# Altium PCB PCB1.PcbDoc
Units mm, origin at the board's own origin, x right, y up, seen from the top; angles counter-clockwise.
Board outline 200 x 170 mm, 2 copper layers (Top Layer, Bottom Layer); 91 components, 73 nets, 246 pads, 10 vias.
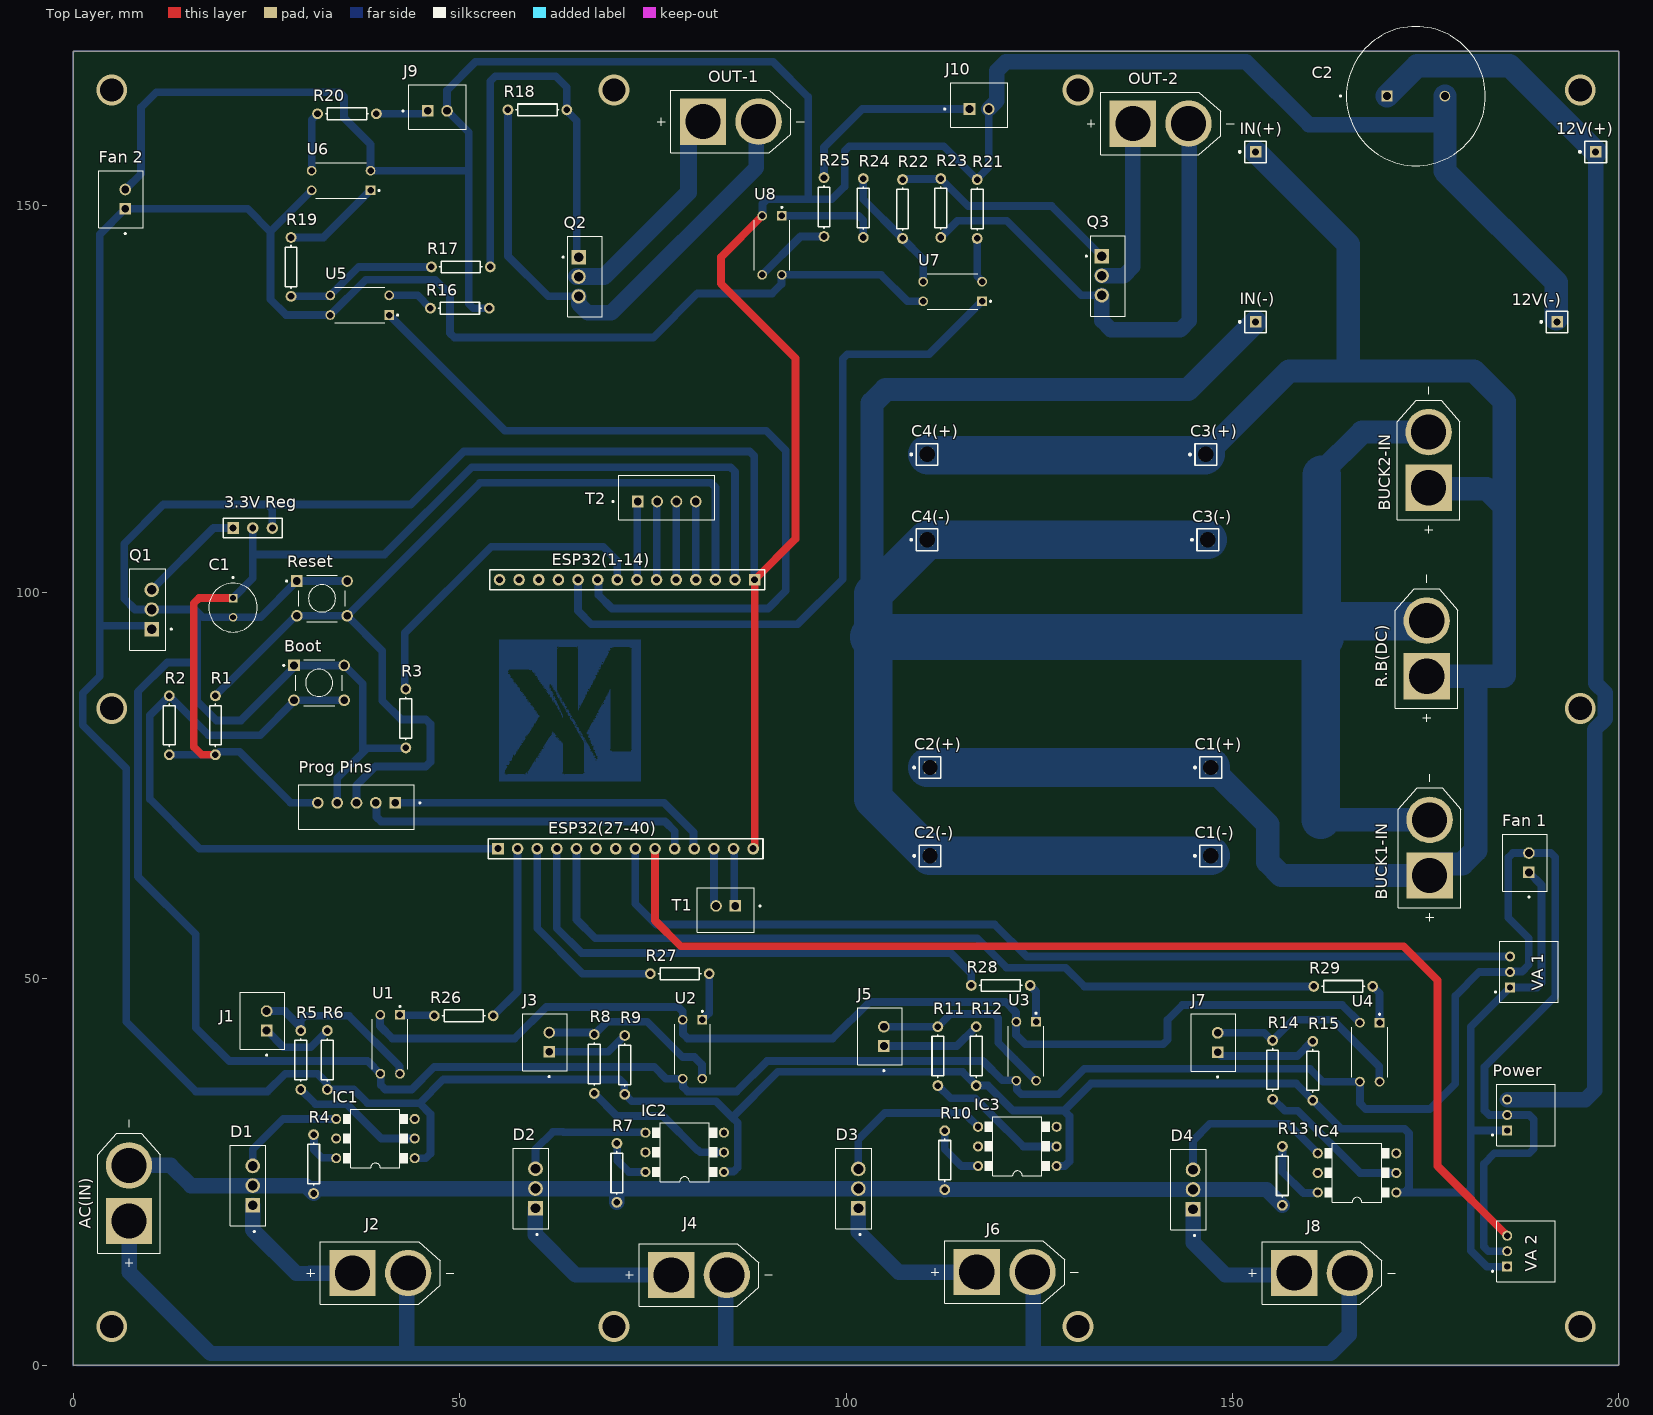
[diagram p0: Top Layer view]
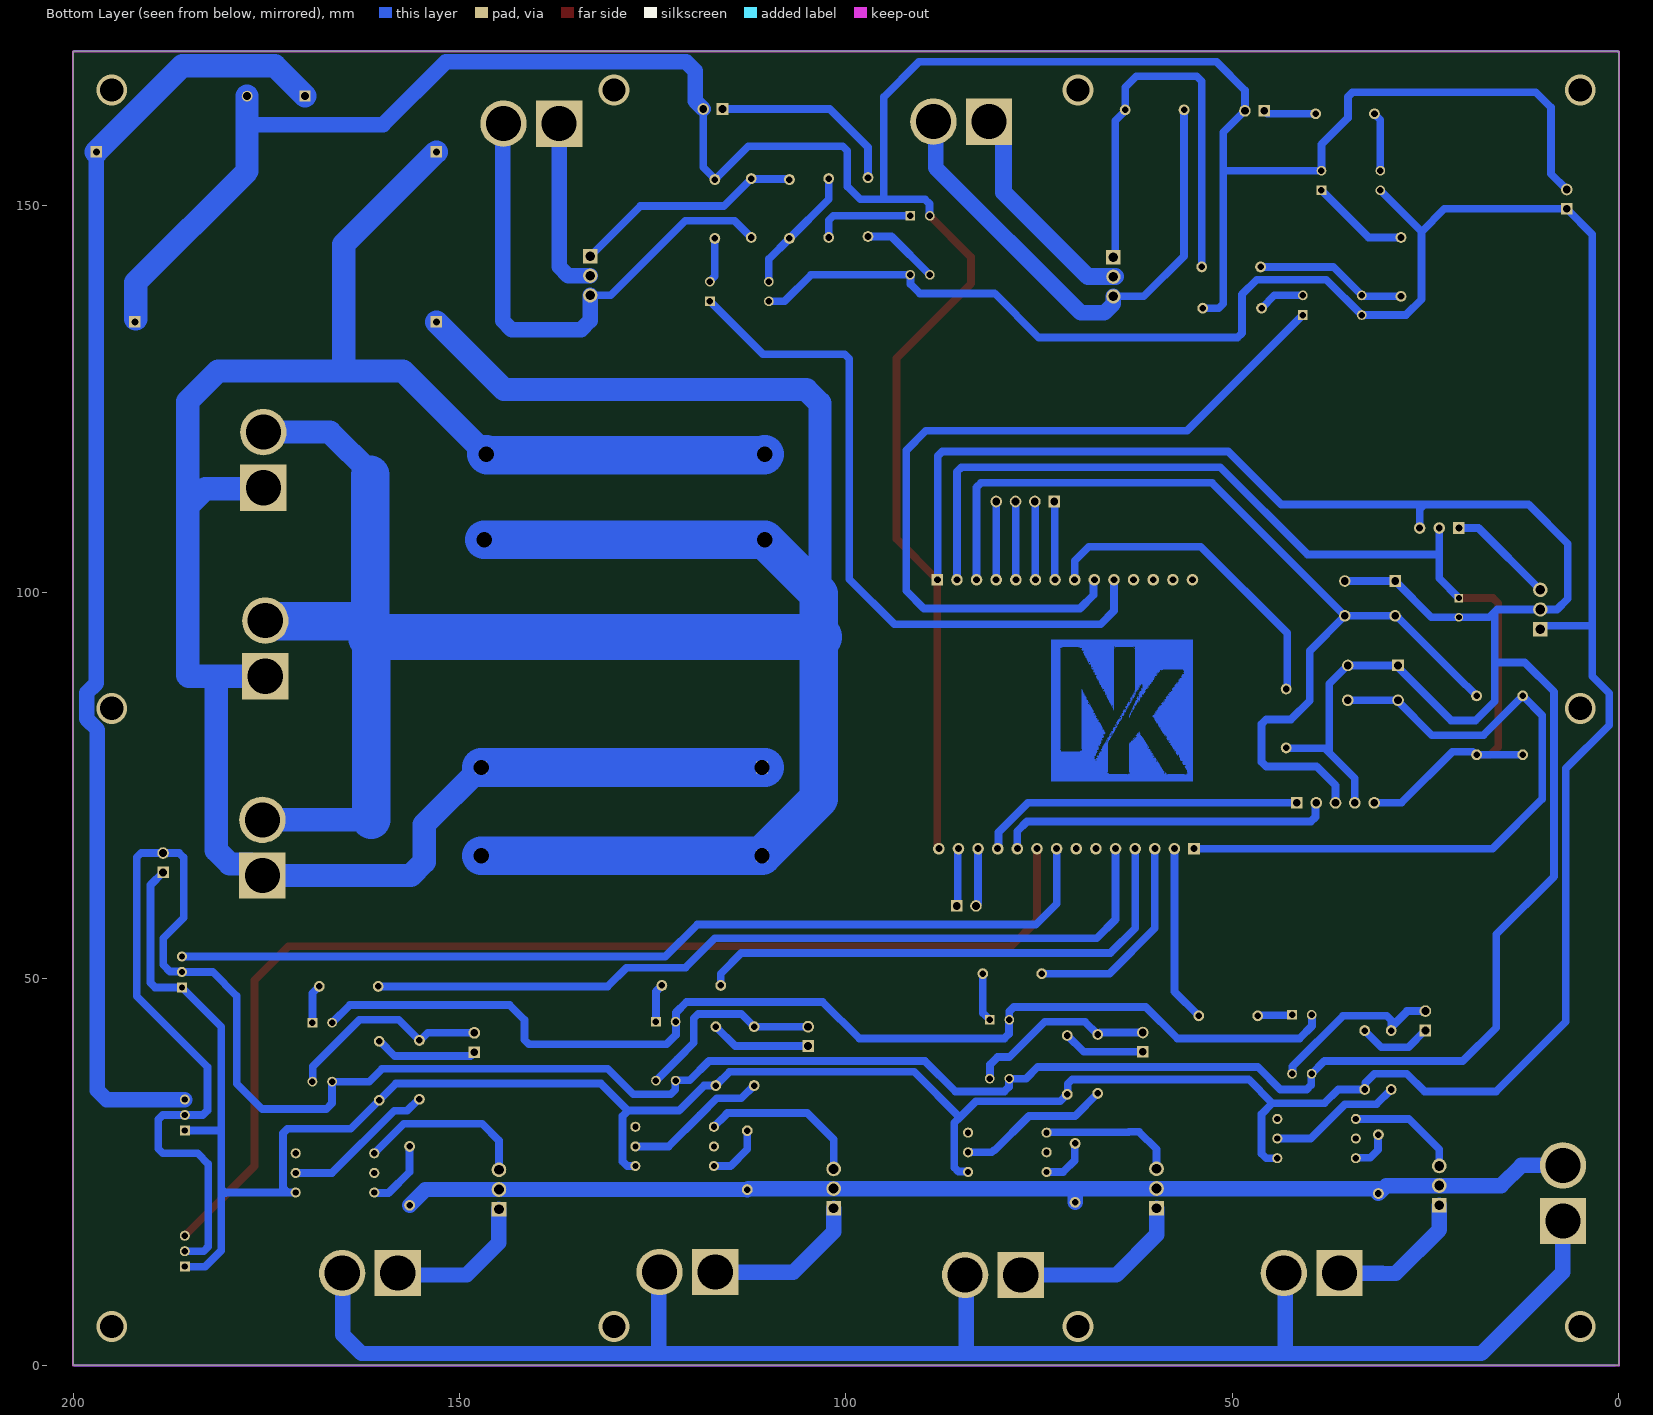
[diagram p1: Bottom Layer view, seen from below]

## Layer stack, top to bottom
Top Solder: solder mask 0.0102, Solder Resist, Dk 3.5
Top Layer: signal copper 0.0356
Dielectric 1: dielectric 0.32, FR-4, Dk 4.8
Bottom Layer: signal copper 0.0356
Bottom Solder: solder mask 0.0102, Solder Resist, Dk 3.5

## Board outline
0,0 200,0 200,170 0,170

## Design rules (kind name [scope] priority, off if disabled: settings)
Clearance [All] p1: gap=0.254 ignorepadtopadclearanceinfootprint=FALSE except(0: Arc-Hole Track-Hole SMDPad-Hole THPad-Hole Via-Hole Fill-Hole Poly-Hole Region-Hole Text-Hole)
PolygonConnect [All] p1: connectstyle=Relief reliefconductorwidth=0.254 reliefentries=4 polygonreliefangle="90 Angle" airgapwidth=0.254
RoutingVias [All] p1: holewidth=0.711 width=1.27 viastyle="Through Hole" minholewidth=0.711 minwidth=1.27 maxholewidth=0.711 maxwidth=1.27
SolderMaskExpansion [All] p1: expansion=0.102 istentingtop=FALSE
Width [All] p1: maxlimit=3 minlimit=0.1 preferedwidth=1 toplayer_minwidth=1 toplayer_maxwidth=1 minimp=50.000000 maximp=50.000000 favimp=50.000000
30 further rules are at their usual default settings.

## Components (designator, comment, footprint, x,y, rotation, side; value= is the part's Value field where it differs from the comment)
"3.3V Reg" "Header 3" HDR1X3 20.701,108.331 r0 top
12V(+) "Plug" PIN1#1 197,157 r90 top
12V(-) "Plug" PIN1#1 192,135 r90 top
AC(IN) "XT60-M" AMASS_XT60-M 7.239,22.269 r90 top
Boot "1825910-2" TE_1825910-2 28.575,90.551 r0 top
BUCK1-IN "XT60-M" AMASS_XT60-M 175.514,66.973 r90 top
BUCK2-IN "XT60-M" AMASS_XT60-M 175.387,117.138 r90 top
C1 "100uF" CAPPRD250W50D630H1500 20.701,98.024 r270 top
C1(+) "Plug" PIN1#2 147.193,77.343 r90 top
C1(-) "Plug" PIN1#3 147.193,65.913 r90 top
C2 "4700uF" CAPPRD750W80D1800H3150 173.736,164.211 r0 top
C2(+) "Plug" PIN1#3 110.871,77.343 r90 top
C2(-) "Plug" PIN1#3 110.871,65.913 r90 top
C3(+) "Plug" PIN1#3 146.558,117.856 r90 top
C3(-) "Plug" PIN1#3 146.812,106.807 r90 top
C4(+) "Plug" PIN1#3 110.49,117.856 r90 top
C4(-) "Plug" PIN1#3 110.49,106.807 r90 top
D1 "BTA16-600B" TO255P1040X460X1975-3 23.241,20.701 r90 top
D2 "BTA16-600B" TO255P1040X460X1975-3 59.817,20.32 r90 top
D3 "BTA16-600B" TO255P1040X460X1975-3 101.6,20.31 r90 top
D4 "BTA16-600B" TO255P1040X460X1975-3 144.907,20.193 r90 top
ESP32(1-14) "Header 14" HDR1X14 88.189,101.638 r180 top
ESP32(27-40) "Header 14" HDR1X14 54.969,66.838 r0 top
"Fan 1" "B2B-XH-A(LF)(SN)" JST_B2B-XH-A(LF)(SN) 187.833,65.024 r90 top
"Fan 2" "B2B-XH-A(LF)(SN)" JST_B2B-XH-A(LF)(SN) 6.223,150.876 r90 top
IC1 "MOC3020" DIL06-A 39.116,29.337 r90 top
IC2 "MOC3020" DIL06-A 79.121,27.559 r90 top
IC3 "MOC3020" DIL06-A 122.174,28.321 r90 top
IC4 "MOC3020" DIL06-A 166.116,24.892 r90 top
IN(+) "Plug" PIN1#1 153,157 r90 top
IN(-) "Plug" PIN1#1 153,135 r90 top
J1 "B2B-XH-A(LF)(SN)" JST_B2B-XH-A(LF)(SN) 24.511,44.577 r90 top
J2 "XT60-M" AMASS_XT60-M 39.751,11.938 r0 top
J3 "B2B-XH-A(LF)(SN)" JST_B2B-XH-A(LF)(SN) 61.07,41.803 r90 top
J4 "XT60-M" AMASS_XT60-M 80.982,11.684 r0 top
J5 "B2B-XH-A(LF)(SN)" JST_B2B-XH-A(LF)(SN) 104.377,42.565 r90 top
J6 "XT60-M" AMASS_XT60-M 120.523,12.065 r0 top
J7 "B2B-XH-A(LF)(SN)" JST_B2B-XH-A(LF)(SN) 147.557,41.763 r90 top
J8 "XT60-M" AMASS_XT60-M 161.588,11.938 r0 top
J9 "B2B-XH-A(LF)(SN)" JST_B2B-XH-A(LF)(SN) 47.137,162.831 r0 top
J10 "B2B-XH-A(LF)(SN)" JST_B2B-XH-A(LF)(SN) 117.221,163.068 r0 top
OUT-1 "XT60-M" AMASS_XT60-M 85.09,160.909 r0 top
OUT-2 "XT60-M" AMASS_XT60-M 140.716,160.655 r0 top
Power "" JST_S3B-PH-K-S(LF)(SN) 185.547,30.385 r90 top
"Prog Pins" "" JST_B5B-XH-A(LF)(SN) 36.663,72.246 r180 top
Q1 "LM7805CT/NOPB" TO254P1054X470X1955-3 10.16,97.79 r90 top
Q2 "IRF3205" TO254P1041X444X2933-3 65.405,143.383 r270 top
Q3 "IRF3205" TO254P1041X444X2933-3 133.096,143.51 r270 top
R1 "" AXIAL-0.3 18.415,82.804 r90 top value=10K
R2 "" AXIAL-0.3 12.446,82.804 r90 top value=10K
R3 "" AXIAL-0.3 43.053,83.693 r90 top value=10K
R4 "" AXIAL-0.3 31.115,26.035 r90 top value="100 Ohm"
R5 "" AXIAL-0.3 29.464,39.497 r270 top value=330R
R6 "" AXIAL-0.3 32.893,39.497 r270 top value=220R
R7 "" AXIAL-0.3 70.358,24.892 r90 top value="100 Ohm"
R8 "" AXIAL-0.3 67.437,38.989 r270 top value=330R
R9 "" AXIAL-0.3 71.374,38.862 r270 top value=220R
R10 "" AXIAL-0.3 112.776,26.543 r90 top value="100 Ohm"
R11 "" AXIAL-0.3 111.887,40.005 r270 top value=330R
R12 "" AXIAL-0.3 116.84,40.005 r270 top value=220R
R13 "" AXIAL-0.3 156.464,24.511 r90 top value="100 Ohm"
R14 "" AXIAL-0.3 155.194,38.227 r270 top value=330R
R15 "" AXIAL-0.3 160.401,38.1 r270 top value=220R
R16 "" AXIAL-0.3 50.038,136.779 r0 top value="100 Ohm"
R17 "" AXIAL-0.3 50.165,142.113 r180 top value="100 Ohm"
R18 "" AXIAL-0.3 60.071,162.433 r0 top value=10k
R19 "" AXIAL-0.3 28.194,142.113 r270 top value="330 Ohm"
R20 "" AXIAL-0.3 35.433,161.925 r0 top value=220R
R21 "" AXIAL-0.3 116.967,149.606 r90 top value="100 Ohm"
R22 "" AXIAL-0.3 107.315,149.606 r270 top value="100 Ohm"
R23 "" AXIAL-0.3 112.268,149.733 r90 top value=10k
R24 "" AXIAL-0.3 102.235,149.733 r90 top value="330 Ohm"
R25 "" AXIAL-0.3 97.155,149.86 r90 top value=220R
R26 "" AXIAL-0.3 50.546,45.212 r180 top value="100 Ohm"
R27 "" AXIAL-0.3 78.486,50.673 r0 top value="100 Ohm"
R28 "" AXIAL-0.3 120.015,49.149 r0 top value="100 Ohm"
R29 "" AXIAL-0.3 164.338,49.022 r0 top value="100 Ohm"
R.B(DC) "XT60-M" AMASS_XT60-M 175.133,92.754 r90 top
Reset "1825910-2" TE_1825910-2 28.956,101.473 r0 top
T1 "B2B-XH-A(LF)(SN)" JST_B2B-XH-A(LF)(SN) 84.435,58.911 r180 top
T2 "B4B-XH-A(LF)(SN)" JST_B4B-XH-A(LF)(SN) 76.815,112.285 r0 top
U1 "PC817X3NSZ1B" DIP762W50P254L495H455Q4 41.021,41.529 r270 top
U2 "PC817X3NSZ1B" DIP762W50P254L495H455Q4 80.137,40.894 r270 top
U3 "PC817X3NSZ1B" DIP762W50P254L495H455Q4 123.317,40.64 r270 top
U4 "PC817X3NSZ1B" DIP762W50P254L495H455Q4 167.767,40.513 r270 top
U5 "PC817X3NSZ1B" DIP762W50P254L495H455Q4 37.084,137.16 r180 top
U6 "PC817X3NSZ1B" DIP762W50P254L495H455Q4 34.671,153.289 r180 top
U7 "PC817X3NSZ1B" DIP762W50P254L495H455Q4 113.792,138.938 r180 top
U8 "PC817X3NSZ1B" DIP762W50P254L495H455Q4 90.424,144.907 r270 top
"VA 1" "S3B-PH-K-S(LF)(SN)" JST_S3B-PH-K-S(LF)(SN) 185.928,48.895 r90 top
"VA 2" "S3B-PH-K-S(LF)(SN)" JST_S3B-PH-K-S(LF)(SN) 185.547,12.764 r90 top

## Footprints (in the part's own frame and the unit in brackets; to place one, negate y for a bottom-side part, rotate by r counter-clockwise, add the part's x,y. Pads: shape width x height; smd on the part's side, far side on the other; paste and mask are expansions set on the pad)
AMASS_XT60-M [mm]
  round 6 hole 4.55: N(3.6,0)
  rect 6x6 / inner round 6 / far side rect 6x6 hole 4.55: P(-3.6,0)
  silkscreen extent -9.5,-4.05 9.5,4.05, body extent -4.05,0 4.05,20.5, height 7.75
AXIAL-0.3 [mm] "Axial Device, Thru-Hole; 2 Leads; 0.3 in Pin Spacing"
  round 1.4 hole 0.85: 1(-3.81,0) 2(3.81,0)
  silkscreen extent -2.77,-0.76 2.77,0.76
CAPPRD250W50D630H1500 [mm]
  round 1.1 hole 0.75: N(1.25,0)
  rect 1.1x1.1 / inner round 1.1 / far side rect 1.1x1.1 hole 0.75: P(-1.25,0)
  silkscreen extent -4,-3.15 3.15,3.15, body extent -3.15,-3.15 3.15,3.15, height 15
CAPPRD750W80D1800H3150 [mm]
  round 1.4 hole 1.05: N(3.75,0)
  rect 1.4x1.4 hole 1.05: P(-3.75,0)
  silkscreen extent -9.85,-9 9,9, body extent -9,-9 9,9, height 31.5
DIL06-A [mm]
  round 1.308 hole 0.8: 1(-2.54,-5.08) 2(0,-5.08) 3(2.54,-5.08) 4(2.54,5.08) 5(0,5.08) 6(-2.54,5.08)
  silkscreen extent -3.81,-4.19 3.81,4.19
DIP762W50P254L495H455Q4 [mm]
  rect 1.26x1.26 / inner round 1.26 / far side rect 1.26x1.26 hole 0.84: 1(-3.81,1.27)
  round 1.26 hole 0.84: 2(-3.81,-1.27) 3(3.81,-1.27) 4(3.81,1.27)
  silkscreen extent -5.01,-2.3 3.25,2.3, body extent -3.94,-2.3 3.94,2.3, height 4.55
HDR1X3 [mm] "Connector; Header; 3 Position"
  rect 1.5x1.5 hole 0.9: 1(0,0)
  round 1.5 hole 0.9: 2(2.54,0) 3(5.08,0)
  silkscreen extent -1.27,-1.27 6.35,1.27
HDR1X14 [mm] "Connector; Header; 14 Position"
  rect 1.5x1.5 hole 0.9: 1(0,0)
  round 1.5 hole 0.9: 2(2.54,0) 3(5.08,0) 4(7.62,0) 5(10.16,0) 6(12.7,0) 7(15.24,0) 8(17.78,0) 9(20.32,0) 10(22.86,0) 11(25.4,0) 12(27.94,0) 13(30.48,0) 14(33.02,0)
  silkscreen extent -1.27,-1.27 34.29,1.27
JST_B2B-XH-A(LF)(SN) [mm]
  rect 1.508x1.508 hole 1: 1(-1.25,-0.525)
  round 1.508 hole 1: 2(1.25,-0.525)
  silkscreen extent -4.55,-2.88 3.7,2.88, body extent -3.7,-2.88 3.7,2.88, height 7
JST_B4B-XH-A(LF)(SN) [mm]
  rect 1.508x1.508 / inner round 1.508 / far side rect 1.508x1.508 hole 1: 1(-3.75,-0.525)
  round 1.508 hole 1: 2(-1.25,-0.525) 3(1.25,-0.525) 4(3.75,-0.525)
  silkscreen extent -7.05,-2.88 6.2,2.88, body extent -6.2,-2.88 6.2,2.88, height 7
JST_B5B-XH-A(LF)(SN) [mm]
  rect 1.508x1.508 / inner round 1.508 / far side rect 1.508x1.508 hole 1: 1(-5,-0.525)
  round 1.508 hole 1: 2(-2.5,-0.525) 3(0,-0.525) 4(2.5,-0.525) 5(5,-0.525)
  silkscreen extent -8.3,-2.88 7.45,2.88, body extent -7.45,-2.88 7.45,2.88, height 7
JST_S3B-PH-K-S(LF)(SN) [mm]
  rect 1.308x1.308 hole 0.8: 1(0,0)
  round 1.308 hole 0.8: 2(2,0) 3(4,0)
  silkscreen extent -1.95,-6.25 5.95,2
PIN1#1 [mm] "Connector; Plug"
  rect 1.5x1.5 hole 0.9: 1(0,0)
  silkscreen extent -1.4,-1.4 1.4,2.17
PIN1#2 [mm] "Connector; Plug"
  rect 1.5x1.5 hole 2: ""(0,0)
  silkscreen extent -1.4,-1.4 1.4,2.17
PIN1#3 [mm] "Connector; Plug"
  rect 1.5x1.5 hole 2: 1(0,0)
  silkscreen extent -1.4,-1.4 1.4,2.17
TE_1825910-2 [mm]
  rect 1.498x1.498 / inner round 1.498 / far side rect 1.498x1.498 hole 0.99: 1(0,0)
  round 1.498 hole 0.99: 2(6.5,0) 3(0,-4.5) 4(6.5,-4.5)
  silkscreen extent -1.42,-5.25 6.24,0.74
TO254P1041X444X2933-3 [mm]
  rect 1.85x1.85 hole 1.23: 1(0,0)
  round 1.85 hole 1.23: 2(2.54,0) 3(5.08,0)
  silkscreen extent -2.67,-2.1 7.75,3.03, body extent -2.67,-1.41 7.75,3.04, height 19.3
TO254P1054X470X1955-3 [mm]
  rect 1.86x1.86 hole 1.24: 1(-2.54,0)
  round 1.86 hole 1.24: 2(0,0) 3(2.54,0)
  silkscreen extent -5.27,-2.64 5.27,2.86
TO255P1040X460X1975-3 [mm]
  rect 1.91x1.91 hole 1.27: 1(0,0)
  round 1.91 hole 1.27: 2(2.55,0) 3(5.1,0)
  silkscreen extent -3.5,-1.7 7.75,2.9

## Part data
"3.3V Reg": "Header, 3-Pin", LatestRevisionDate=17-Jul-2002, LatestRevisionNote="Re-released for DXP Platform.", Publisher="Altium Limited"
AC(IN) BUCK1-IN BUCK2-IN J2 J4 J6 J8 OUT-1 OUT-2 R.B(DC): "Plug; DC supply; XT60; male; PIN: 2; for cable; soldered; 30A; 500V", Package=Package, Availability="Not in stock", Check_prices=https://www.snapeda.com/parts/XT60-M/AMASS/view-part/?ref=eda, MF=AMASS, MP=XT60-M, Price=None, SnapEDA_Link=https://www.snapeda.com/parts/XT60-M/AMASS/view-part/?ref=snap
Boot Reset: "50 mA SPST Round Actuator 160 Gram Force Tactile Pushbutton Switch", Package=None, Availability="In Stock", Check_prices=https://www.snapeda.com/parts/1825910-2/TE+Connectivity+ALCOSWITCH+Switches/view-part/?ref=eda, EU_RoHS_Compliance=Compliant, MF="TE Connectivity", MP=1825910-2, Price=None, Purchase-URL=https://pricing.snapeda.com/search/part/1825910-2/?ref=eda, SnapEDA_Link=https://www.snapeda.com/parts/1825910-2/TE+Connectivity+ALCOSWITCH+Switches/view-part/?ref=snap
C1: library part EEUEB1E101, "CAP ALUM 100UF 20% 25V RADIAL", Package="RADIAL-2 Panasonic", Availability="In Stock", Check_prices=https://www.snapeda.com/parts/EEUEB1E101/Panasonic/view-part/?ref=eda, MF=Panasonic, MP=EEUEB1E101, Price=None, Purchase-URL=https://pricing.snapeda.com/search/part/EEUEB1E101/?ref=eda, SnapEDA_Link=https://www.snapeda.com/parts/EEUEB1E101/Panasonic/view-part/?ref=snap
C2: library part EEUTP1E472, "CAP ALUM 4700UF 20% 25V RADIAL", Package="RADIAL-2 Panasonic", Availability="In Stock", Check_prices=https://www.snapeda.com/parts/EEU-TP1E472/Panasonic/view-part/2307869/?ref=eda, MF=Panasonic, MP=EEU-TP1E472, Price=None, Purchase-URL=https://pricing.snapeda.com/search/part/EEU-TP1E472/?ref=eda, SnapEDA_Link=https://www.snapeda.com/parts/EEU-TP1E472/Panasonic/view-part/2307869/?ref=snap
D1 D2 D3 D4: "TRIAC Standard 600V 16A Through Hole IITO-220E", Package=None, Availability=Unavailable, MP=BTA16-600B, Price=None
ESP32(1-14) ESP32(27-40): "Header, 14-Pin", LatestRevisionDate=17-Jul-2002, LatestRevisionNote="Re-released for DXP Platform.", Publisher="Altium Limited"
"Fan 1" "Fan 2" J1 J3 J5 J7 J9 J10 T1: "Connector Header Through Hole 2 position 0.098 (2.50mm)", Package=None, Availability="In Stock", Check_prices=https://www.snapeda.com/parts/B2B-XH-A(LF)(SN)/JST+Sales+America+Inc./view-part/?ref=eda, MF="JST Sales America Inc.", MP=B2B-XH-A(LF)(SN), Price=None, Purchase-URL=https://pricing.snapeda.com/search/part/B2B-XH-A(LF)(SN)/?ref=eda, SnapEDA_Link=https://www.snapeda.com/parts/B2B-XH-A(LF)(SN)/JST+Sales+America+Inc./view-part/?ref=snap
IC1 IC2 IC3 IC4: "Optoisolator Triac Output 5300Vrms 1 Channel 6-DIP", Package="DIP-6 ON Semiconductor", Availability=Unavailable, MF="ON Semiconductor", MP=MOC3020, Price=None, SnapEDA_Link=https://www.snapeda.com/parts/MOC3020/ON%20Semiconductor/view-part/2780094/?ref=snap
Power: library part S3B-PH-K-S(LF)(SN), "Connector Header Through Hole, Right Angle 3 position 0.079\" (2.00mm)", Package=None, Availability=Unavailable, MP=S3B-PH-K-S(LF)(SN), Price=None
"Prog Pins": library part B5B-XH-A(LF)(SN), "Connector Header Through Hole 5 position 0.098 (2.50mm)", Package=None, Availability="In Stock", Check_prices=https://www.snapeda.com/parts/B5B-XH-A(LF)(SN)/JST+Sales+America+Inc./view-part/?ref=eda, MF="JST Sales America Inc.", MP=B5B-XH-A(LF)(SN), Price=None, Purchase-URL=https://pricing.snapeda.com/search/part/B5B-XH-A(LF)(SN)/?ref=eda, SnapEDA_Link=https://www.snapeda.com/parts/B5B-XH-A(LF)(SN)/JST+Sales+America+Inc./view-part/?ref=snap
Q1: Package=None, Availability=Unavailable, MP=LM7805CT/NOPB, Price=None
Q2 Q3: "N-Channel 55V 110A (Tc) 200W (Tc) Through Hole TO-220AB", Package="TO-220 Infineon", Availability="In Stock", Check_prices=https://www.snapeda.com/parts/IRF3205/Infineon+Technologies/view-part/?ref=eda, MF="Infineon Technologies", MP=IRF3205, Price=None, Purchase-URL=https://pricing.snapeda.com/search/part/IRF3205/?ref=eda, SnapEDA_Link=https://www.snapeda.com/parts/IRF3205/Infineon+Technologies/view-part/?ref=snap
R1 R2 R3 R4 R5 R6 R7 R8 R9 R10 R11 R12 R13 R14 R15 R16 R17 R18 R19 R20 R21 R22 R23 R24 R25 R26 R27 R28 R29: library part Res1, "Resistor", LatestRevisionDate=17-Jul-2002, LatestRevisionNote="Re-released for DXP Platform.", PackageDescription="Axial Device, Thru-Hole; 2 Leads; 0.3 in Pin Spacing", PackageReference=AXIAL-0.3, Published=8-Jun-2000, Publisher="Altium Limited"
T2: "Connector Header Through Hole 4 position 0.098 (2.50mm)", Package=None, Availability="In Stock", Check_prices=https://www.snapeda.com/parts/B4B-XH-A(LF)(SN)/JST+Sales+America+Inc./view-part/?ref=eda, MF="JST Sales", MP=B4B-XH-A(LF)(SN), Price=None, Purchase-URL=https://pricing.snapeda.com/search/part/B4B-XH-A(LF)(SN)/?ref=eda, SnapEDA_Link=https://www.snapeda.com/parts/B4B-XH-A(LF)(SN)/JST+Sales+America+Inc./view-part/?ref=snap
U1 U2 U3 U4 U5 U6 U7 U8: "Optoisolator Transistor Output - 1 Channel 4-DIP", Package="DIP-4 Sharp Microelectronics", Availability="In Stock", Check_prices=https://www.snapeda.com/parts/PC817X3NSZ1B/Sharp+Microelectronics/view-part/?ref=eda, MF="Sharp Microelectronics", MP=PC817X3NSZ1B, Price=None, Purchase-URL=https://pricing.snapeda.com/search/part/PC817X3NSZ1B/?ref=eda, SnapEDA_Link=https://www.snapeda.com/parts/PC817X3NSZ1B/Sharp+Microelectronics/view-part/?ref=snap
"VA 1" "VA 2": "Connector Header Through Hole, Right Angle 3 position 0.079\" (2.00mm)", Package=None, Availability=Unavailable, MP=S3B-PH-K-S(LF)(SN), Price=None
12V(+) 12V(-) C1(+) C1(-) C2(+) C2(-) C3(+) C3(-) C4(+) C4(-) IN(+) IN(-): LatestRevisionDate=17-Jul-2002, LatestRevisionNote="Re-released for DXP Platform.", Publisher="Altium Limited"

## Via types
v1: diameter 4, hole 3, Top Layer to Bottom Layer, 10 vias

## Nets (pads, with @x,y where several pads share a name; then routed paths per layer and width w, separated by ;. In a path a pad name is that pad's centre, name@x,y a point inside that pad or via, vN(x,y) a via of type N, cw(c..) or ccw(c..) an arc to the next point about the centre after c; other vN are vias at no path point)
"Net3.3V Reg_1": "3.3V Reg.1" Q1.3 | length 13.9
  Bottom Layer w1: Q1.3 18.161,108.331 20.701,108.331
"Net3.3V Reg_2": "3.3V Reg.2" "Prog Pins.5" C1.P ESP32(1-14).2 R1.1 R2.1 | length 140.7
  Top Layer w1: R1.1 16.637,78.994 15.621,80.01 15.621,98.599 16.296,99.274 C1.P
  Bottom Layer w1: R2.1 R1.1 18.523,78.994 18.904,79.375 21.532,79.375 28.136,72.771 31.663,72.771 ; C1.P 23.241,101.814 23.241,104.902 ; 23.241,108.331 23.241,104.902 ; 85.649,101.638 85.649,115.619 85.063,116.205 51.578,116.205 40.275,104.902 23.241,104.902
"Net3.3V Reg_3": 12V(-).1 "3.3V Reg.3" "Fan 1.2" "Fan 2.2" "Prog Pins.4" "VA 1.2" "VA 2.2" Boot.1 Boot.2 C1.N C2.N ESP32(1-14).1 ESP32(27-40).14 J9.2 J10.2 Power.2 Q1.2 R3.1 R16.2 R21.2 Reset.1 Reset.2 U1.3 U2.3 U3.3 U4.3 U6.2 U8.2 | length 951.3
  Top Layer w1: 87.989,66.838 87.989,66.973 88.189,67.173 88.189,101.638 93.472,106.921 93.472,130.302 83.82,139.954 83.82,143.383 U8.2
  Bottom Layer w1: 6.748,152.126 8.795,154.173 8.795,162.769 10.746,164.719 34.466,164.719 35.052,164.133 35.052,161.389 38.481,157.96 U6.2 51.054,154.559 51.181,154.686 ; 25.781,108.331 25.781,110.793 25.195,111.379 ; 34.163,72.771 34.163,75.946 37.465,79.248 ; Reset.2 Reset.1 24.257,96.774 C1.N 16.764,96.774 16.066,97.472 ; R3.1@43.053,79.842 38.059,79.842 37.465,79.248 ; R16.2 51.767,136.779 51.181,137.365 51.181,154.686 ; 88.189,101.638 88.138,101.689 88.138,117.651 87.552,118.237 50.546,118.237 43.688,111.379 25.195,111.379 ; U8.2 89.203,148.766 89.203,150.29 89.789,150.876 95.123,150.876 ; J10.2 118.471,155.023 116.967,153.519 R21.2 112.649,157.734 100.408,157.734 99.822,157.148 99.822,152.527 98.171,150.876 95.123,150.876 ; 185.547,14.764 183.102,14.764 182.499,15.367 182.499,26.035 183.896,27.432 188.39,27.432 188.976,28.018 188.976,31.799 188.39,32.385 Power.2 183.212,32.385 182.626,32.971 182.626,38.608 191.77,47.752 191.77,65.708 191.184,66.294 188.378,66.294 188.358,66.274 186.26,66.274 185.674,65.688 185.674,57.912 188.341,55.245 188.341,51.816 187.479,50.954 185.987,50.954 185.928,50.895 181.942,50.895 178.816,47.769 178.816,36.449 175.514,33.147 167.259,33.147 166.497,33.909 U4.3 161.671,36.703 160.02,38.354 130.81,38.354 127.508,35.052 122.683,35.052 122.097,35.638 122.097,36.78 U3.3 121.997,36.88 120.219,36.88 117.729,39.37 89.789,39.37 85.852,35.433 79.503,35.433 78.917,36.019 78.917,37.034 U2.3 76.708,37.084 75.184,38.608 46.736,38.608 43.815,35.687 40.387,35.687 39.801,36.273 39.801,37.669 38.1,39.37 20.193,39.37 15.875,43.688 15.875,55.753 8.382,63.246 8.382,87.122 12.192,90.932 16.066,90.932 ; 16.066,90.932 16.066,97.472 ; 16.066,90.932 16.066,85.915 18.542,83.439 21.717,83.439 28.326,90.048 28.326,90.302 Boot.1 Boot.2 37.465,88.161 37.465,79.248 ; 16.066,97.472 15.748,97.79 Q1.2 8.001,97.79 6.604,99.187 6.604,106.299 11.684,111.379 25.195,111.379 ; 51.181,154.686 51.181,159.512 J9.2 48.387,164.973 52.07,168.656 90.551,168.656 95.123,164.084 95.123,150.876
  Bottom Layer w2: J10.2 119.507,163.579 119.507,167.484 120.679,168.656 151.765,168.656 159.893,160.528 177.486,160.528
  Bottom Layer w3: C2.N 177.486,160.528 177.486,154.514 191.897,140.103 191.897,135.382
Net12V(+)_1: 12V(+).1 C2.P Power.3 | length 167.6
  Bottom Layer w2: Power.3 195.678,34.385 196.85,35.557 196.85,82.248 198.254,83.652 198.254,86.991 197,88.246 197,157
  Bottom Layer w3: C2.P 173.923,168.148 185.852,168.148 197,157
NetAC(IN)_N: AC(IN).N D1.2 D2.2 D3.2 D4.2 R4.1 R7.1 R10.1 R13.1 | length 153.5
  Bottom Layer w2: 7.239,25.869 12.612,25.869 15.23,23.251 30.089,23.251 R4.1 ; R4.1@31.115,22.87 D2.2 70.231,22.87 ; R7.1 70.358,22.743 70.231,22.87 ; R13.1 154.422,22.743 D4.2 112.786,22.743 R10.1 112.649,22.86 D3.2 101.59,22.87 70.231,22.87
NetAC(IN)_P: AC(IN).P J2.N J4.N J6.N J8.N | length 209.1
  Bottom Layer w2: 7.239,18.669 7.239,12.065 17.78,1.524 43.18,1.524 ; J2.N 43.18,11.767 43.18,1.524 ; J4.N 84.455,11.557 84.455,1.524 ; J6.N 124.206,11.982 124.206,1.524 ; J8.N 165.1,11.85 165.1,3.937 162.687,1.524 124.206,1.524 ; 43.18,1.524 84.455,1.524 ; 84.455,1.524 124.206,1.524
NetBoot_3: Boot.3 Boot.4 ESP32(27-40).1 R2.2 | length 88.8
  Bottom Layer w1: Boot.4 Boot.3 28.575,85.916 24.193,81.534 17.526,81.534 R2.2 9.906,84.074 9.906,73.279 16.347,66.838 54.969,66.838
NetBUCK1-IN_N: BUCK1-IN.N BUCK2-IN.N C1(-).1 C2(-).1 C3(-).1 C4(-).1 IN(-).1 R.B(DC).N | length 345.7
  Bottom Layer w3: 103.505,99.822 103.378,99.949 103.378,124.481 105.135,126.238 144.238,126.238 153,135 ; 161.036,114.681 161.544,115.189 161.39,115.343 166.784,120.738 BUCK2-IN.N ; 161.417,70.573 BUCK1-IN.N ; 161.544,94.107 161.544,96.266 ; 175.045,96.266 175.133,96.354
  Bottom Layer w5: 146.812,106.807 110.49,106.807 103.505,99.822 103.505,94.234 103.505,73.279 110.871,65.913 147.193,65.913 ; 161.417,70.573 161.417,94.234 ; 161.544,115.189 161.544,96.266 175.045,96.266
  Bottom Layer w6: 103.505,94.234 161.417,94.234
NetBUCK1-IN_P: BUCK1-IN.P BUCK2-IN.P C2(+).1 C3(+).1 C4(+).1 IN(+).1 R.B(DC).P | length 274
  Bottom Layer w3: 146.558,117.856 157.353,128.651 164.973,128.651 ; 147.193,77.343 154.559,69.977 154.559,65.13 156.316,63.373 BUCK1-IN.P 177.014,64.873 179.726,64.873 181.483,66.63 181.483,89.154 ; 153,157 164.973,145.027 164.973,128.651 ; 175.133,89.154 181.483,89.154 ; BUCK2-IN.P 175.521,113.404 182.887,113.404 185.166,111.125 ; 164.973,128.651 181.229,128.651 185.166,124.714 185.166,111.125 ; 181.483,89.154 185.039,89.154 185.166,89.281 185.166,111.125
  Bottom Layer w5: 110.49,77.343 110.871,77.343 147.193,77.343 ; 110.49,117.856 110.617,117.729 146.431,117.729 146.558,117.856
NetD1_1: D1.1 J2.P | length 18.4
  Bottom Layer w2: D1.1 23.241,17.526 28.89,11.877 30.546,11.877 30.607,11.938 J2.P
NetD1_3: D1.3 IC1.4 | length 14.6
  Bottom Layer w1: D1.3 23.241,27.94 27.178,31.877 IC1.4
NetD2_1: D2.1 J4.P | length 23.2
  Bottom Layer w2: D2.1 59.817,16.891 65.024,11.684 J4.P
NetD2_3: D2.3 IC2.4 | length 17.7
  Bottom Layer w1: D2.3 59.817,27.94 62.103,30.226 63.373,30.226 63.443,30.156 73.984,30.156 IC2.4
NetD3_1: D3.1 J6.P | length 20.5
  Bottom Layer w2: D3.1 101.6,17.272 106.807,12.065 J6.P
NetD3_3: D3.3 IC3.4 | length 21.5
  Bottom Layer w1: D3.3 101.6,29.21 105.029,32.639 115.365,32.639 115.57,32.434 115.57,32.385 IC3.4
NetD4_1: D4.1 J8.P | length 19.2
  Bottom Layer w2: D4.1 144.907,15.875 149.098,11.684 157.734,11.684 J8.P
NetD4_3: D4.3 IC4.4 | length 22.4
  Bottom Layer w1: D4.3 144.907,29.083 147.066,31.242 157.226,31.242 IC4.4
NetESP32(1-14)_3: "Prog Pins.3" ESP32(1-14).3 R1.2 Reset.3 Reset.4 | length 126.6
  Bottom Layer w1: R1.2 21.098,89.297 28.525,96.724 28.572,96.724 28.821,96.973 Reset.3 Reset.4 ; 36.663,72.771 36.671,72.779 36.671,75.025 39.116,77.47 45.642,77.47 46.228,78.056 46.228,82.98 45.642,83.566 42.418,83.566 40.005,85.979 40.005,92.424 Reset.4 ; 83.109,101.638 83.109,113.587 82.523,114.173 52.656,114.173 Reset.4
NetESP32(1-14)_4: ESP32(1-14).4 T2.4 | length 10.1
  Bottom Layer w1: T2.4 80.567,111.758 80.567,101.64 80.569,101.638
NetESP32(1-14)_5: ESP32(1-14).5 T2.3 | length 10.1
  Bottom Layer w1: 78.029,101.638 78.047,101.656 78.047,111.742 T2.3
NetESP32(1-14)_6: ESP32(1-14).6 T2.2 | length 10.2
  Bottom Layer w1: 75.489,101.638 75.527,101.676 75.527,111.722 T2.2
NetESP32(1-14)_7: ESP32(1-14).7 T2.1 | length 10.2
  Bottom Layer w1: 72.949,101.638 73.007,101.696 73.007,111.702 T2.1
NetESP32(1-14)_8: ESP32(1-14).8 R3.2 | length 42.6
  Bottom Layer w1: R3.2 42.976,87.58 42.976,87.862 42.926,87.913 42.926,94.742 54.102,105.918 68.58,105.918 70.409,104.089 70.409,101.638
NetESP32(1-14)_9: ESP32(1-14).9 U5.1 | length 104.6
  Bottom Layer w1: U5.1 55.88,120.904 89.662,120.904 92.202,118.364 92.202,100.203 89.916,97.917 69.723,97.917 67.965,99.675 67.965,101.542 67.869,101.638
NetESP32(1-14)_10: ESP32(1-14).10 U7.1 | length 91
  Bottom Layer w1: 65.329,101.638 65.329,97.612 67.056,95.885 93.726,95.885 99.568,101.727 99.568,130.224 100.154,130.81 110.744,130.81 U7.1
NetESP32(27-40)_2: ESP32(27-40).2 R26.1 | length 22.9
  Bottom Layer w1: R26.1 57.509,48.365 57.509,66.838
NetESP32(27-40)_3: ESP32(27-40).3 R27.1 | length 27.4
  Bottom Layer w1: 60.049,66.838 60.049,56.537 65.913,50.673 R27.1
NetESP32(27-40)_4: ESP32(27-40).4 R28.1 | length 67.9
  Bottom Layer w1: 62.589,66.838 62.589,56.537 65.786,53.34 113.538,53.34 116.205,50.673 R28.1
NetESP32(27-40)_5: ESP32(27-40).5 R29.1 | length 108.1
  Bottom Layer w1: 65.129,66.838 65.129,57.68 67.564,55.245 116.967,55.245 120.777,51.435 128.397,51.435 130.81,49.022 R29.1
NetESP32(27-40)_8: "VA 1.3" ESP32(27-40).8 | length 123.1
  Bottom Layer w1: 72.749,66.838 72.749,59.712 75.438,57.023 119.253,57.023 123.381,52.895 185.928,52.895
NetESP32(27-40)_9: "VA 2.3" ESP32(27-40).9 | length 150.5
  Top Layer w1: 75.289,66.838 75.289,57.553 78.613,54.229 172.134,54.229 176.53,49.833 176.53,25.781 185.547,16.764
NetESP32(27-40)_10: "Prog Pins.2" ESP32(27-40).10 | length 43.5
  Bottom Layer w1: 39.163,72.771 39.26,72.674 39.26,70.944 39.846,70.358 76.581,70.358 77.829,69.11 77.829,66.838
NetESP32(27-40)_11: "Prog Pins.1" ESP32(27-40).11 | length 42.3
  Bottom Layer w1: 41.663,72.771 76.454,72.771 80.273,68.952 80.273,66.934 80.369,66.838
NetESP32(27-40)_12: ESP32(27-40).12 T1.2 | length 7.7
  Bottom Layer w1: 83.005,66.742 82.909,66.838 82.909,59.849 83.185,59.573 T1.2
NetESP32(27-40)_13: ESP32(27-40).13 T1.1 | length 7.5
  Bottom Layer w1: 85.449,66.838 85.545,66.742 85.545,59.576 T1.1
"NetFan 1_1": "Fan 1.1" "Fan 2.1" "VA 1.1" "VA 2.1" IC1.1 IC2.1 IC3.1 IC4.1 Power.1 Q1.1 R6.2 R9.2 R12.2 R15.2 U5.4 U6.4 U7.4 U8.4 | length 547.5
  Bottom Layer w1: 3.429,95.758 3.507,95.68 9.73,95.68 Q1.1 ; U6.4 25.527,146.685 ; IC1.1 45.642,26.797 46.228,27.383 46.228,32.512 44.831,33.909 ; IC2.1 84.26,25.078 85.452,25.078 85.979,25.605 85.979,31.369 85.281,32.067 ; U7.4 107.95,137.668 104.521,141.097 U8.4 91.644,141.047 91.644,139.855 90.473,138.684 80.772,138.684 75.057,132.969 49.354,132.969 48.768,133.555 48.768,138.557 46.863,140.462 37.846,140.462 U5.4 27.559,135.89 25.527,137.922 25.527,146.685 ; IC3.1 128.319,25.781 128.905,26.367 128.905,32.258 128.207,32.956 ; IC4.1 172.271,22.352 180.204,22.352 180.272,22.284 180.848,22.86 ; 172.271,22.411 172.847,22.987 172.847,30.021 172.261,30.607 164.084,30.607 R15.2 158.242,36.449 131.699,36.449 128.207,32.956 ; 185.547,12.764 182.943,12.764 180.848,14.859 180.848,22.86 ; Power.1 180.848,30.385 ; 188.358,63.774 189.992,62.14 189.992,49.481 189.406,48.895 185.928,48.895 180.848,43.815 180.848,30.385 ; 25.527,146.685 22.586,149.626 6.748,149.626 3.429,146.307 3.429,95.68 3.429,89.154 1.24,86.965 1.24,82.834 6.858,77.216 6.858,44.45 15.875,35.433 25.146,35.433 27.432,37.719 31.626,37.719 32.816,36.529 32.816,35.764 R6.2 36.322,35.687 38.1,33.909 44.831,33.909 ; 44.831,33.909 47.912,36.99 70.712,36.99 71.297,36.404 71.297,35.129 R9.2 71.405,35.052 72.294,34.163 83.185,34.163 85.281,32.067 ; 85.281,32.067 91.186,37.973 115.062,37.973 R12.2 118.364,36.195 121.603,32.956 128.207,32.956 ; 180.848,22.86 180.848,30.385
NetIC1_2: IC1.2 R5.2 | length 17.4
  Bottom Layer w1: R5.2 31.369,33.782 35.433,33.782 39.878,29.337 IC1.2
NetIC1_6: IC1.6 R4.2 | length 5.3
  Bottom Layer w1: R4.2 31.156,29.804 31.156,27.891 32.191,26.856 33.977,26.856 IC1.6
NetIC2_2: IC2.2 R8.2 | length 19.9
  Bottom Layer w1: R8.2 70.358,32.258 76.327,32.258 80.772,27.813 80.899,27.813 81.153,27.559 IC2.2
NetIC2_6: IC2.6 R7.2 | length 6.5
  Bottom Layer w1: R7.2 70.399,28.661 70.399,26.502 71.882,25.019 IC2.6
NetIC3_2: IC3.2 R11.2 | length 18.6
  Bottom Layer w1: R11.2 113.538,34.544 116.713,34.544 118.872,32.385 118.877,32.385 122.941,28.321 IC3.2
NetIC3_6: IC3.6 R10.2 | length 7.6
  Bottom Layer w1: R10.2 112.776,27.94 114.935,25.781 IC3.6
NetIC4_2: IC4.2 R14.2 | length 19.9
  Bottom Layer w1: R14.2 155.302,34.417 156.793,32.926 158.463,32.926 166.497,24.892 IC4.2
NetIC4_6: IC4.6 R13.2 | length 9
  Bottom Layer w1: R13.2 156.464,25.019 159.19,22.293 160.977,22.293 IC4.6
NetJ1_1: J1.1 R6.1 | length 9.7
  Bottom Layer w1: J1.1 27.215,41.148 30.734,41.148 R6.1
NetJ1_2: J1.2 R5.1 U1.4 | length 26.5
  Bottom Layer w1: J1.2 27.452,45.827 29.387,43.892 29.387,43.384 R5.1 ; 27.325,45.827 29.387,43.765 29.387,43.492 R5.1@29.4,43.492 ; R5.1@29.464,43.815 29.464,44.626 30.05,45.212 35.687,45.212 42.241,38.658 42.241,37.769 U1.4
NetJ3_1: J3.1 R9.1 | length 10.7
  Bottom Layer w1: J3.1 69.255,40.553 R9.1
NetJ3_2: J3.2 R8.1 U2.4 | length 24.7
  Bottom Layer w1: J3.2 67.075,43.053 67.329,42.799 R8.1 69.088,44.45 74.295,44.45 78.867,39.878 80.391,39.878 81.357,38.912 81.357,37.134 U2.4
NetJ5_1: J5.1 R12.1 | length 13.1
  Bottom Layer w1: J5.1 114.34,41.315 R12.1 R12.1@116.917,43.738
NetJ5_2: J5.2 R11.1 U3.4 | length 25.8
  Bottom Layer w1: J5.2 R11.1 113.538,45.466 119.112,45.466 119.697,44.88 119.697,41.719 121.793,39.624 U3.4
NetJ7_1: J7.1 R15.1 | length 13.3
  Bottom Layer w1: J7.1 148.59,40.005 158.388,40.005 160.293,41.91 R15.1
NetJ7_2: J7.2 R14.1 U4.4 | length 26.9
  Bottom Layer w1: J7.2 154.11,43.013 155.086,42.037 R14.1 157.861,44.704 162.941,44.704 168.987,38.658 168.987,36.753 U4.4
NetJ9_1: J9.1 R20.2 | length 6.8
  Bottom Layer w1: R20.2 45.506,161.925 J9.1
NetJ10_1: J10.1 R25.2 | length 24.8
  Bottom Layer w1: R25.2 97.155,157.607 102.091,162.543 J10.1
NetOUT-1_N: OUT-1.N Q2.3 R18.1 | length 68.5
  Bottom Layer w1: R18.1 56.261,143.51 61.468,138.303 Q2.3
  Bottom Layer w2: Q2.3 65.405,137.35 66.577,136.178 69.63,136.178 88.394,154.942 88.394,160.613 OUT-1.N
NetOUT-1_P: OUT-1.P Q2.2 | length 28.9
  Bottom Layer w2.2: Q2.2@65.163,140.855 68.719,140.855 79.59,151.726 79.59,159.009 OUT-1.P
NetOUT-2_N: OUT-2.N Q3.3 R23.1 | length 66.8
  Bottom Layer w1: R23.1 114.427,148.082 120.777,148.082 130.429,138.43 Q3.3
  Bottom Layer w2: Q3.3 133.096,135.157 134.268,133.985 143.26,133.985 144.432,135.157 144.432,160.539 OUT-2.N
NetOUT-2_P: OUT-2.P Q3.2 | length 23.5
  Bottom Layer w2: Q3.2 135.944,140.97 137.116,142.142 137.116,159.512 OUT-2.P@138.259,160.655
NetQ2_1: Q2.1 R17.1 R18.2 | length 57
  Bottom Layer w1: R17.1 53.975,166.116 54.626,166.767 62.463,166.767 63.881,165.349 63.881,162.325 65.173,161.032 Q2.1@65.173,143.615
NetQ3_1: Q3.1 R22.1 R23.2 | length 30
  Bottom Layer w1: R22.1 107.379,153.48 112.204,153.48 R23.2 115.824,149.987 126.619,149.987 Q3.1
NetR16_1: R16.1 U5.2 | length 6
  Bottom Layer w1: U5.2 44.577,138.43 R16.1
NetR17_2: R17.2 R19.2 U5.3 | length 19.7
  Bottom Layer w1: R19.2 33.077,138.303 33.204,138.43 U5.3 36.957,142.113 R17.2
NetR19_1: R19.1 U6.1 | length 12.8
  Bottom Layer w1: R19.1 32.385,145.923 U6.1
NetR20_1: R20.1 U6.3 | length 7.7
  Bottom Layer w1: U6.3 30.861,161.139 31.623,161.901 R20.1
NetR21_1: R21.1 U7.2 | length 5.9
  Bottom Layer w1: R21.1 116.967,140.913 117.602,140.278 U7.2
NetR22_2: R22.2 R24.2 U7.3 | length 16.5
  Bottom Layer w1: R24.2 102.235,150.876 R22.2 109.982,143.129 U7.3
NetR24_1: R24.1 U8.1 | length 13
  Bottom Layer w1: U8.1 101.649,148.717 102.235,148.131 R24.1
NetR25_1: R25.1 U8.3 | length 10.1
  Bottom Layer w1: U8.3 94.107,146.05 R25.1
NetR26_2: R26.2 U1.1 | length 4.5
  Bottom Layer w1: U1.1 42.355,45.276 46.672,45.276 R26.2
NetR27_2: R27.2 U2.1 | length 6.3
  Bottom Layer w1: U2.1 82.296,45.593 R27.2
NetR28_2: R28.2 U3.1 | length 5
  Bottom Layer w1: R28.2 123.825,49.125 124.587,48.363 U3.1
NetR29_2: R29.2 U4.1 | length 5.1
  Bottom Layer w1: R29.2 169.037,48.133 U4.1
NetU1_2: U1.2 U2.2 U3.2 U4.2 | length 144.5
  Bottom Layer w1: U1.2 39.701,45.289 39.701,43.892 41.303,42.291 57.15,42.291 61.214,46.355 78.281,46.355 78.867,45.769 U2.2 78.917,44.654 78.917,42.877 79.503,42.291 98.298,42.291 102.997,46.99 120.65,46.99 121.997,45.643 121.997,44.5 U3.2 121.997,44.4 121.997,42.749 123.218,41.529 141.019,41.529 141.605,42.115 141.605,44.704 143.51,46.609 164.211,46.609 U4.2
pads on no net: C1(+). ESP32(1-14).11 ESP32(1-14).12 ESP32(1-14).13 ESP32(1-14).14 ESP32(27-40).6 ESP32(27-40).7 IC1.3 IC1.5 IC2.3 IC2.5 IC3.3 IC3.5 IC4.3 IC4.5
copper on no net: | length 739.3
  Bottom Layer w0.25: 0,0 0,6.604 0,169.854 0.181,170.035 199.854,170.035 200,169.889 200,0.146 199.854,0 0.713,0 ; 0.505,-0.001 0.712,-0.001
  other v1: 5,5 70,5 130,5 195,5 5,85 195,85 5,165 70,165 130,165 195,165

## Keep-outs
Bottom Layer:
  the board outline again, w0.254

## Other copper
Bottom Layer:
  region net "Net3.3V Reg_2": 1341 vertices and 365 holes, not listed, extent 55.141,75.548 73.458,93.892